# Altium PCB VRef_MEZ.PcbDoc
Units mm, origin at the board's own origin, x right, y up, seen from the top; angles counter-clockwise.
Board outline 59 x 38 mm, 2 copper layers (Top Layer, Bottom Layer); 53 components, 25 nets, 158 pads, 36 vias.
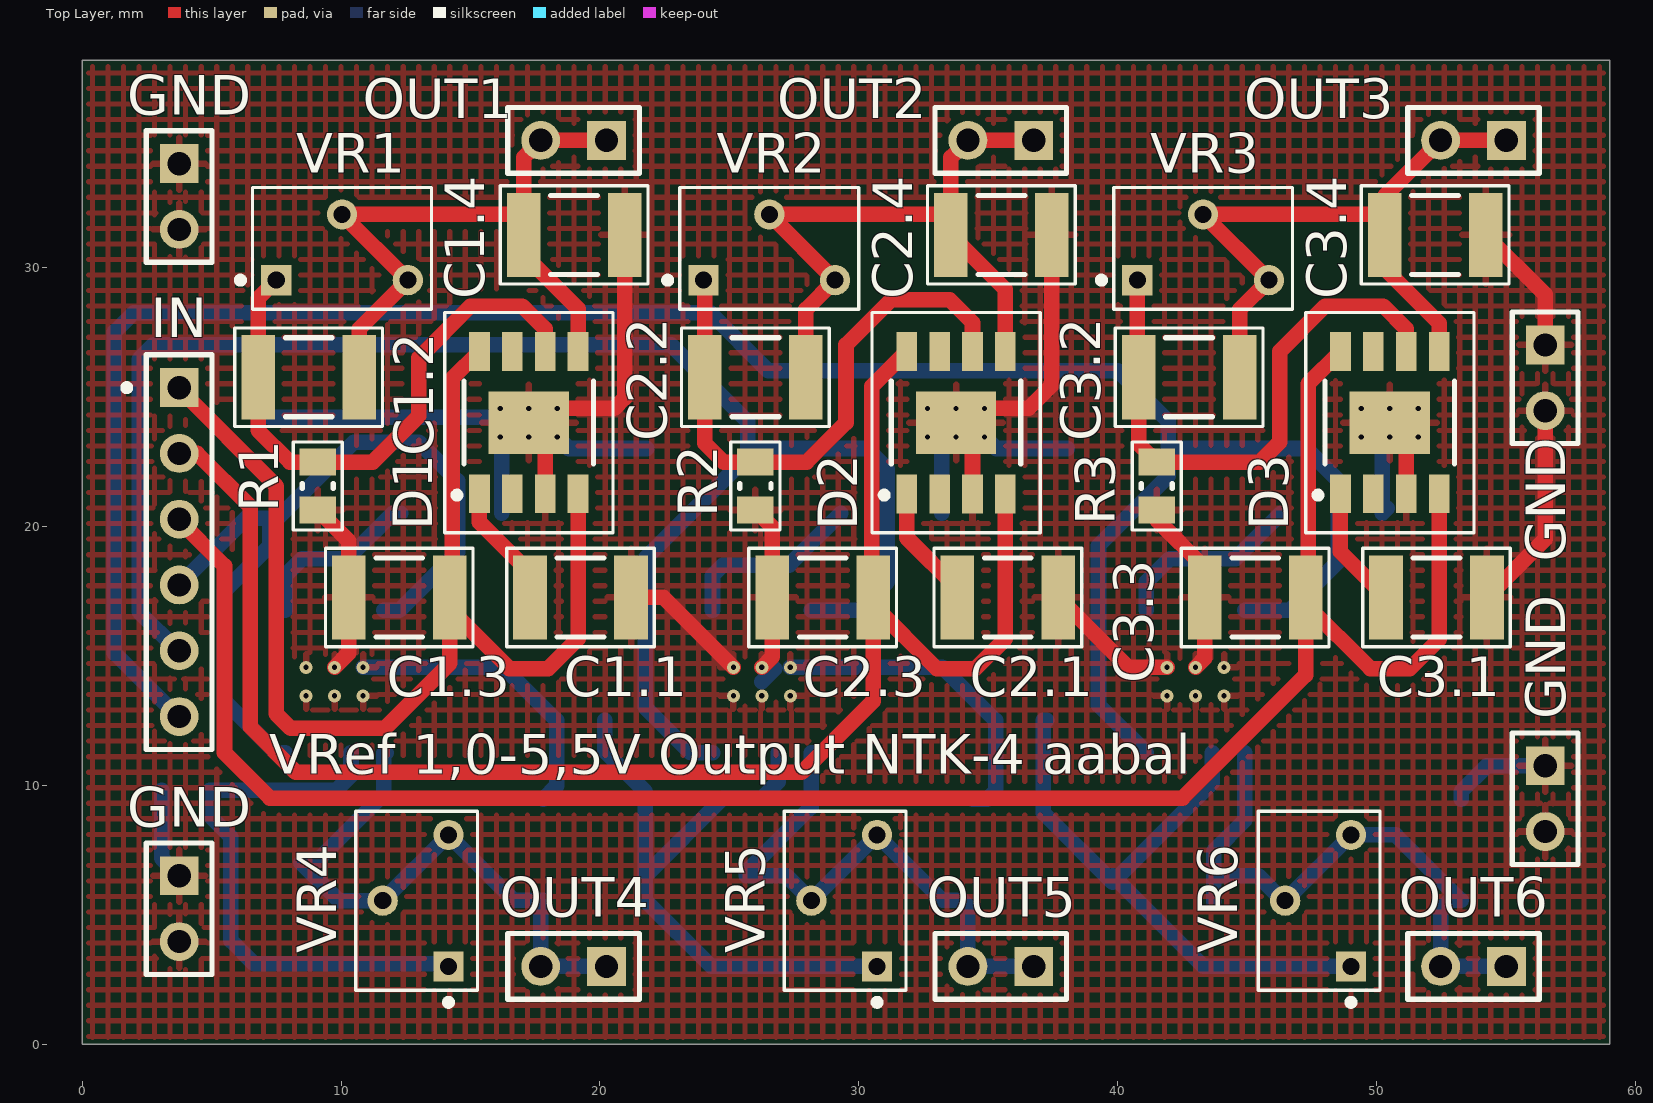
[diagram p0: Top Layer view]
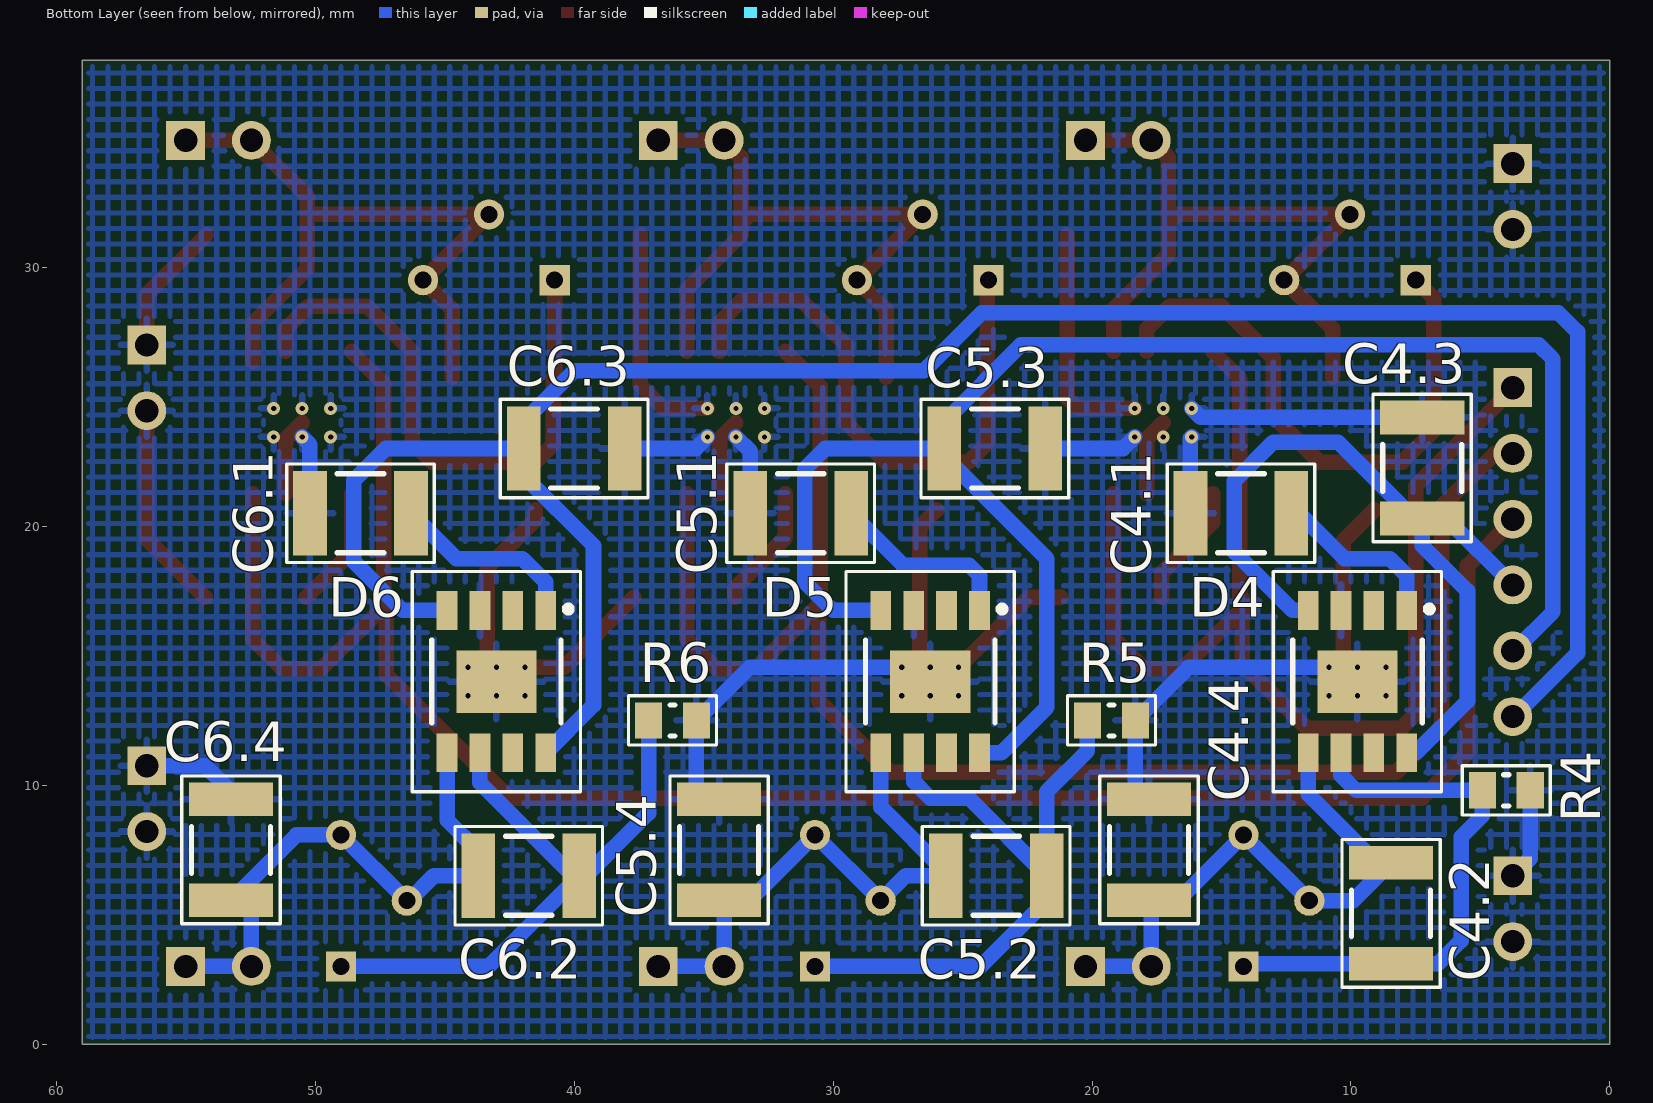
[diagram p1: Bottom Layer view, seen from below]

## Layer stack, top to bottom
Top Solder: solder mask 0.0102, Solder Resist, Dk 3.5
Top Layer: signal copper 0.0356
Dielectric 1: dielectric 0.32, FR-4, Dk 4.8
Bottom Layer: signal copper 0.0356
Bottom Solder: solder mask 0.0102, Solder Resist, Dk 3.5

## Board outline
0,0 59,0 59,38 0,38

## Design rules (kind name [scope] priority, off if disabled: settings)
Clearance [All] p1: gap=0.254 ignorepadtopadclearanceinfootprint=FALSE except(0: Arc-Hole Track-Hole SMDPad-Hole THPad-Hole Via-Hole Fill-Hole Poly-Hole Region-Hole Text-Hole)
PolygonConnect [All] p1: connectstyle=Relief reliefconductorwidth=0.254 reliefentries=4 polygonreliefangle="90 Angle" airgapwidth=0.254
RoutingVias [All] p1: holewidth=0.711 width=1.27 viastyle="Through Hole" minholewidth=0.711 minwidth=1.27 maxholewidth=0.711 maxwidth=1.27
SolderMaskExpansion [All] p1: expansion=0.102
Width [All] p1: maxlimit=0.6 minlimit=0.254 preferedwidth=0.254
30 further rules are at their usual default settings.

## Classes and differential pairs
component class VRef_MEZ: C1.1 C1.2 C1.3 C1.4 C2.1 C2.2 C2.3 C2.4 C3.1 C3.2 C3.3 C3.4 C4.1 C4.2 C4.3 C4.4 C5.1 C5.2 C5.3 C5.4 C6.1 C6.2 C6.3 C6.4 D1 D2 D3 D4 D5 D6 GND IN OUT1 OUT2 OUT3 OUT4 OUT5 OUT6 R1 R2 R3 R4 R5 R6 VR2 VR3 VR4 VR5 VR6

## Components (designator, comment, footprint, x,y, rotation, side; value= is the part's Value field where it differs from the comment)
C1.1 "0,01uF" CAP_1812 19.25,17.25 r0 top
C1.2 "C_FF" CAP_1812 8.75,25.75 r180 top
C1.3 "4,7uF" CAP_1812 12.25,17.25 r0 top
C1.4 "10uF" CAP_1812 19,31.25 r0 top
C2.1 "0,01uF" CAP_1812 35.75,17.25 r0 top
C2.2 "C_FF" CAP_1812 26,25.75 r180 top
C2.3 "4,7uF" CAP_1812 28.6,17.25 r0 top
C2.4 "10uF" CAP_1812 35.5,31.25 r0 top
C3.1 "0,01uF" CAP_1812 52.3,17.25 r0 top
C3.2 "C_FF" CAP_1812 42.75,25.75 r180 top
C3.3 "4,7uF" CAP_1812 45.3,17.25 r0 top
C3.4 "10uF" CAP_1812 52.25,31.25 r0 top
C4.1 "0,01uF" CAP_1812 14.25,20.5 r0 bottom
C4.2 "C_FF" CAP_1812 8.45,5.05 r270 bottom
C4.3 "4,7uF" CAP_1812 7.25,22.25 r270 bottom
C4.4 "10uF" CAP_1812 17.8,7.5 r90 bottom
C5.1 "0,01uF" CAP_1812 31.25,20.5 r0 bottom
C5.2 "C_FF" CAP_1812 23.7,6.5 r180 bottom
C5.3 "4,7uF" CAP_1812 23.75,23 r0 bottom
C5.4 "10uF" CAP_1812 34.4,7.5 r90 bottom
C6.1 "0,01uF" CAP_1812 48.25,20.5 r0 bottom
C6.2 "C_FF" CAP_1812 41.75,6.5 r180 bottom
C6.3 "4,7uF" CAP_1812 40,23 r0 bottom
C6.4 "10uF" CAP_1812 53.25,7.5 r90 bottom
D1 "LP3878MR-ADJ/NOPB" LP3878MR-ADJ/NOPB 17.25,24 r90 top
D2 "LP3878MR-ADJ/NOPB" LP3878MR-ADJ/NOPB 33.75,24 r90 top
D3 "LP3878MR-ADJ/NOPB" LP3878MR-ADJ/NOPB 50.5,24 r90 top
D4 "LP3878MR-ADJ/NOPB" LP3878MR-ADJ/NOPB 9.75,14 r270 bottom
D5 "LP3878MR-ADJ/NOPB" LP3878MR-ADJ/NOPB 26.25,14 r270 bottom
D6 "LP3878MR-ADJ/NOPB" LP3878MR-ADJ/NOPB 43,14 r270 bottom
GND "Header 2" HDR1X2 56.5,10.75 r270 top
GND "Header 2" HDR1X2 56.5,27 r270 top
GND "Header 2" HDR1X2 3.75,34 r270 top
GND "Header 2" HDR1X2 3.75,6.5 r270 top
IN "Header 6" HDR1X6 3.75,25.35 r270 top
OUT1 "Header 2" HDR1X2 20.25,34.9 r180 top
OUT2 "Header 2" HDR1X2 36.75,34.9 r180 top
OUT3 "Header 2" HDR1X2 55,34.9 r180 top
OUT4 "Header 2" HDR1X2 20.25,3 r180 top
OUT5 "Header 2" HDR1X2 36.75,3 r180 top
OUT6 "Header 2" HDR1X2 55,3 r180 top
R1 "RES" RES_0805 9.1,21.55 r90 top
R2 "RES" RES_0805 26,21.55 r90 top
R3 "RES" RES_0805 41.5,21.55 r90 top
R4 "RES" RES_0805 4,9.8 r0 bottom
R5 "RES" RES_0805 19.25,12.5 r0 bottom
R6 "RES" RES_0805 36.2,12.5 r0 bottom
VR1 "RES 3266W" "RES 3266W" 7.5,29.5 r0 top
VR2 "RES 3266W" "RES 3266W" 24,29.5 r0 top
VR3 "RES 3266W" "RES 3266W" 40.75,29.5 r0 top
VR4 "RES 3266W" "RES 3266W" 14.15,3 r90 top (schematic designator VR4.1)
VR5 "RES 3266W" "RES 3266W" 30.7,3 r90 top
VR6 "RES 3266W" "RES 3266W" 49,3 r90 top

## Footprints (in the part's own frame and the unit in brackets; to place one, negate y for a bottom-side part, rotate by r counter-clockwise, add the part's x,y. Pads: shape width x height; smd on the part's side, far side on the other; paste and mask are expansions set on the pad)
CAP_1812 [mm]
  rect 1.3x3.25 smd: 1(-1.95,0) 2(1.95,0)
  silkscreen extent -2.85,-1.9 2.85,1.9, body extent -2.25,-1.6 2.25,1.6, height 2
HDR1X2 [mm] "Connector; Header; 2 Position"
  rect 1.5x1.5 hole 0.9: 1(0,0)
  round 1.5 hole 0.9: 2(2.54,0)
  silkscreen extent -1.27,-1.27 3.81,1.27
HDR1X6 [mm] "Connector; Header; 6 Position"
  rect 1.5x1.5 hole 0.9: 1(0,0)
  round 1.5 hole 0.9: 2(2.54,0) 3(5.08,0) 4(7.62,0) 5(10.16,0) 6(12.7,0)
  silkscreen extent -1.27,-1.27 13.97,1.27
LP3878MR-ADJ/NOPB [mm] "SOIC, 8-Leads, Body 4,90x3,90mm, Pitch 1,27mm, Thermal Pad 3,10x2,41mm, IPC Medium Density"
  rect 1.5x0.8 smd: 1(-2.75,1.905) 2(-2.75,0.635) 3(-2.75,-0.635) 4(-2.75,-1.905) 5(2.75,-1.905) 6(2.75,-0.635) 7(2.75,0.635) 8(2.75,1.905)
  rect 2.41x3.1 smd: 9(0,0)
  silkscreen extent -4.25,-3.25 4.25,3.25, body extent -2,-2.5 2,2.5, height 1.68
"RES 3266W" [mm]
  rect 1.168x1.168 hole 0.66: 1(0,0)
  round 1.168 hole 0.66: 2(2.54,2.54) 3(5.08,0)
  silkscreen extent -1.48,-1.12 5.99,3.58, body extent -0.81,-1.02 5.9,3.48, height 8.77
RES_0805 [mm]
  rect 1.05x1.4 smd: 1(-0.925,0) 2(0.925,0)
  silkscreen extent -1.7,-0.95 1.7,0.95, body extent -1.1,-0.7 1.1,0.7, height 1

## Part data
C1.1 C1.2 C1.3 C1.4 C2.1 C2.2 C2.3 C2.4 C3.1 C3.2 C3.3 C3.4 C4.1 C4.2 C4.3 C4.4 C5.1 C5.2 C5.3 C5.4 C6.1 C6.2 C6.3 C6.4: library part CAP
GND GND GND GND OUT1 OUT2 OUT3 OUT4 OUT5 OUT6: "Header, 2-Pin", LatestRevisionDate=17-Jul-2002, LatestRevisionNote="Re-released for DXP Platform.", Publisher="Altium Limited"
IN: "Header, 6-Pin", LatestRevisionDate=17-Jul-2002, LatestRevisionNote="Re-released for DXP Platform.", Publisher="Altium Limited"

## Via types
v1: diameter 0.5, hole 0.2, Top Layer to Bottom Layer, 36 vias

## Nets (pads, with @x,y where several pads share a name; then routed paths per layer and width w, separated by ;. In a path a pad name is that pad's centre, name@x,y a point inside that pad or via, vN(x,y) a via of type N, cw(c..) or ccw(c..) an arc to the next point about the centre after c; other vN are vias at no path point)
GND: C1.1.2 C1.3.1 C1.4.2 C2.1.2 C2.3.1 C2.4.2 C3.1.2 C3.3.1 C3.4.2 C4.1.2 C4.3.1 C4.4.2 C5.1.2 C5.3.1 C5.4.2 C6.1.2 C6.3.1 C6.4.2 D1.3 D1.9 D2.3 D2.9 D3.3 D3.9 D4.3 D4.9 D5.3 D5.9 D6.3 D6.9 GND.1 GND.2 R1.1 R2.1 R3.1 R4.1 R5.1 R6.1 | length 128.8
  Top Layer w0.6: R1.1 10.3,19.425 C1.3.1 10.3,15.1 v1(9.75,14.55) ; D1.9 17.885,23.365 D1.3 ; v1(18.35,24.55) 20.55,24.55 20.95,24.95 C1.4.2 ; C1.1.2 22.45,17.25 v1(25.15,14.55) ; R2.1 26.65,19.975 C2.3.1 26.65,14.95 v1(26.25,14.55) ; D2.9 34.385,23.365 D2.3 ; v1(34.85,24.55) 36.55,24.55 37.45,25.45 C2.4.2 ; C2.1.2 40.4,14.55 v1(41.9,14.55) ; R3.1 41.5,20.25 43.35,18.4 C3.3.1 43.35,14.9 v1(43,14.55) ; D3.9 51.135,23.365 D3.3 ; C3.4.2 56.5,28.95 GND.1@56.5,27 ; C3.1.2 56.5,19.5 GND.2@56.5,24.46
  Bottom Layer w0.6: R4.1 3.075,7.175 GND.1@3.75,6.5 ; C4.3.1 15.8,24.2 v1(16.15,24.55) ; v1(10.85,14.55) 16.275,14.55 R5.1 18.325,9.975 C4.4.2 ; v1(16.15,23.45) 16.2,23.4 C4.1.2 ; v1(18.35,23.45) 18.8,23 C5.3.1 ; D5.9 D5.9@26.75,14.5 ; v1(27.35,14.55) 33.225,14.55 R6.1 35.275,9.775 34.95,9.45 C5.4.2 ; C5.1.2 33.2,22.9 v1(33.75,23.45) ; v1(34.85,23.45) 35.3,23 C6.3.1 ; C6.1.2@50.4,20.7 C6.1.2 50.2,23.15 v1(50.5,23.45) ; C6.4.2 53.25,9.75 54.25,10.75 GND.1@56.5,10.75
  other v1: 8.65,13.45 9.75,13.45 10.85,13.45 25.15,13.45 26.25,13.45 27.35,13.45 41.9,13.45 43,13.45 44.1,13.45 8.65,14.55 44.1,14.55 17.25,23.45 32.65,23.45 49.4,23.45 51.6,23.45 17.25,24.55 32.65,24.55 33.75,24.55 49.4,24.55 50.5,24.55 51.6,24.55
IN1: C1.3.2 D1.4 D1.8 IN.1 | length 46.6
  Top Layer w0.6: IN.1@3.7,25.35 7.5,21.55 7.5,12.75 8.052,12.198 11.698,12.198 14.2,14.7 C1.3.2@14.2,16.8 ; D1.8 14.292,25.697 14.292,17.305 14.2,17.214 C1.3.2@14.2,16.8 ; D1.4 19.155,15.655 18,14.5 16.5,14.5 C1.3.2@14.2,16.8
IN2: C2.3.2 D2.4 D2.8 IN.2 | length 64.1
  Top Layer w0.6: IN.2 4.44,22.81 6.5,20.75 6.5,12.25 8.25,10.5 27.8,10.5 30.55,13.25 C2.3.2@30.55,16.75 ; D2.8 30.5,25.405 30.5,17.3 C2.3.2 30.55,16.95 33,14.5 34.5,14.5 35.655,15.655 D2.4
IN3: C3.3.2 D3.4 D3.8 IN.3 | length 79.5
  Top Layer w0.6: IN.3@3.7,20.27 5.5,18.47 5.5,11.25 7.25,9.5 42.5,9.5 47.25,14.25 C3.3.2@47.25,17 ; D3.8 47.345,25.5 47.345,17.345 C3.3.2 C3.3.2@47.25,17 ; D3.4 52.405,15.63 51.275,14.5 49.75,14.5 C3.3.2@47.25,17
IN4: C4.3.2 D4.4 D4.8 IN.4 | length 31.1
  Bottom Layer w0.6: IN.4 6.32,20.3 C4.3.2 ; D4.8 7.5,11.25 5.5,13.25 5.5,17.5 7.25,19.25 C4.3.2 ; D4.4 12.25,16.75 14.5,19 14.5,21.75 13,23.25 10.5,23.25 7.55,20.3 C4.3.2
IN5: C5.3.2 D5.4 D5.8 IN.5 | length 66.4
  Bottom Layer w0.6: IN.5 3.7,15.19 2.2,16.69 2.2,26.45 2.75,27 22.75,27 25.7,24.05 C5.3.2 ; D5.8 23.5,11.25 21.75,13 21.75,18.75 25.7,22.7 C5.3.2 ; D5.4 30,16.75 31.1,17.85 31.1,22.2 30.3,23 C5.3.2
IN6: C6.3.2 D6.4 D6.8 IN.6 | length 87.9
  Bottom Layer w0.6: IN.6@3.7,12.65 1.25,15.1 1.25,27.5 2,28.25 24.25,28.25 26.5,26 40,26 41.95,24.05 C6.3.2 ; D6.8 39.25,13.095 39.25,19.25 41.95,21.95 C6.3.2 ; D6.4 46.625,16.75 48.5,18.625 48.5,21.775 47.275,23 C6.3.2
NetC1.1_1: C1.1.1 D1.1 | length 4.8
  Top Layer w0.6: D1.1 15.345,20.155 17.3,18.2 C1.1.1
NetC1.2_2: C1.2.2 D1.6 R1.2 VR1.1 | length 22.7
  Top Layer w0.6: VR1.1 6.8,28.8 C1.2.2 6.8,23.7 8.025,22.475 R1.2 11.225,22.475 13,24.25 13,26.5 15,28.5 17,28.5 17.885,27.615 D1.6
NetC2.1_1: C2.1.1 D2.1 | length 4.8
  Top Layer w0.6: D2.1 31.845,19.555 33.8,17.6 C2.1.1
NetC2.2_2: C2.2.2 D2.6 R2.2 VR2.1 | length 22.9
  Top Layer w0.6: VR2.1 24.05,29.45 C2.2.2 24.05,23.2 24.775,22.475 R2.2@25.95,22.475 ; R2.2@26,22.425 R2.2@25.95,22.475 ; D2.6 34.385,27.865 33.5,28.75 31.25,28.75 29.5,27 29.5,24 27.975,22.475 R2.2 R2.2@25.95,22.475
NetC3.1_1: C3.1.1 D3.1 | length 4.7
  Top Layer w0.6: D3.1 48.595,19.005 C3.1.1
NetC3.2_2: C3.2.2 D3.6 R3.2 VR3.1 | length 22.7
  Top Layer w0.6: VR3.1 40.75,25.8 C3.2.2 40.8,23.175 R3.2 45.475,22.475 46.25,23.25 46.25,26.75 48,28.5 50.25,28.5 51.135,27.615 D3.6
NetC4.1_1: C4.1.1 D4.1 | length 6.8
  Bottom Layer w0.6: D4.1 7.845,18.095 8.5,18.75 10.25,18.75 12,20.5 C4.1.1
NetC4.2_2: C4.2.2 D4.6 R4.2 VR4.1 | length 21.5
  Bottom Layer w0.6: D4.6 10.385,10.385 9.8,9.8 R4.2 4.925,8.825 5.75,8 5.75,4 6.65,3.1 C4.2.2 14.05,3.1 VR4.1
NetC5.1_1: C5.1.1 D5.1 | length 7.3
  Bottom Layer w0.6: D5.1 24.345,18.095 24.75,18.5 27.3,18.5 C5.1.1
NetC5.2_2: C5.2.2 D5.6 R5.2 VR5.1 | length 25.4
  Bottom Layer w0.6: R5.2 20.175,11.325 21.75,9.75 C5.2.2 ; D5.6 26.885,10.135 26.25,9.5 24.75,9.5 C5.2.2 ; VR5.1 24.3,3 21.75,5.55 C5.2.2
NetC6.1_1: C6.1.1 D6.1 | length 7.4
  Bottom Layer w0.6: D6.1 41.095,17.845 42,18.75 44.55,18.75 C6.1.1
NetC6.2_2: C6.2.2 D6.6 R6.2 VR6.1 | length 24.7
  Bottom Layer w0.6: R6.2@37.25,12.5 R6.2 37.125,8.925 39.8,6.25 C6.2.2@39.925,6.375 ; C6.2.2 C6.2.2@39.925,6.375 ; D6.6 43.635,10.085 C6.2.2@39.925,6.375 ; VR6.1 43.3,3 C6.2.2@39.925,6.375
OUT1: C1.2.1 C1.4.1 D1.5 OUT1.1 OUT1.2 VR1.2 VR1.3 | length 26.9
  Top Layer w0.6: C1.2.1 10.7,27.62 VR1.3 VR1.2 16.71,32.04 C1.4.1@17.05,31.7 ; D1.5 19.155,28.395 17.05,30.5 C1.4.1 C1.4.1@17.05,31.7 ; OUT1.1@20,34.9 OUT1.2 17.05,34.24 C1.4.1@17.05,31.7
OUT2: C2.2.1 C2.4.1 D2.5 OUT2.1 OUT2.2 VR2.2 VR2.3 | length 26.8
  Top Layer w0.6: C2.2.1 27.95,28.37 VR2.3 VR2.2 33.21,32.04 C2.4.1@33.55,31.7 ; D2.5 35.655,29.145 C2.4.1 C2.4.1@33.55,31.7 ; OUT2.1 OUT2.2 33.55,34.24 C2.4.1@33.55,31.7
OUT3: C3.2.1 C3.4.1 D3.5 OUT3.1 OUT3.2 VR3.2 VR3.3 | length 27.7
  Top Layer w0.6: C3.2.1 44.7,28.37 VR3.3 VR3.2 50.21,32.04 C3.4.1@50.3,31.95 ; D3.5@52.405,26.345 D3.5 52.405,27.845 50.3,29.95 C3.4.1 C3.4.1@50.3,31.95 ; OUT3.1 OUT3.2 50.3,32.74 C3.4.1@50.3,31.95
OUT4: C4.2.1 C4.4.1 D4.5 OUT4.1 OUT4.2 VR4.2 VR4.3 | length 23.2
  Bottom Layer w0.6: D4.5@11.75,11.25 D4.5 11.655,9.655 9,7 C4.2.1 9.91,5.54 VR4.2 VR4.3 16.68,5.55 C4.4.1 17.71,5.46 OUT4.2 OUT4.1
OUT5: C5.2.1 C5.4.1 D5.5 OUT5.1 OUT5.2 VR5.2 VR5.3 | length 21.9
  Bottom Layer w0.6: D5.5@28.25,11.25 D5.5 28.155,9.155 25.65,6.65 C5.2.1 27.2,6.5 VR5.2 VR5.3 33.23,5.55 34,5.55 34.21,5.34 OUT5.2 OUT5.1
OUT6: C6.2.1 C6.4.1 D6.5 OUT6.1 OUT6.2 VR6.2 VR6.3 | length 24
  Bottom Layer w0.6: C6.2.1@43.7,5.5 C6.2.1@43.7,6.45 ; D6.5 44.905,8.655 43.7,7.45 C6.2.1 45.42,6.5 46.42,5.5 VR6.2 VR6.3 50.72,8.08 C6.4.1 52.8,5.55 52.46,5.21 OUT6.2 OUT6.1
pads on no net: D1.2 D1.7 D2.2 D2.7 D3.2 D3.7 D4.2 D4.7 D5.2 D5.7 D6.2 D6.7

## Polygon pours and split planes (outlines as drawn)
GND on Bottom Layer "GND_L02_P060" (hatched 90Degree grid 0.6 track 0.2, remove dead copper, pour order 60): 0.25,37.75 58.75,37.75 58.75,0.25 0.25,0.25
GND on Bottom Layer "GND_L02_P066" (hatched 90Degree grid 0.6 track 0.2, remove dead copper, pour order 66): 0.25,37.75
GND on Bottom Layer "GND_L02_P064" (hatched 90Degree grid 0.6 track 0.2, remove dead copper, pour order 64): -1,36
GND on Bottom Layer "GND_L02_P062" (hatched 90Degree grid 0.6 track 0.2, remove dead copper, pour order 62): 0.25,37.75
GND on Bottom Layer "GND_L02_P026" (hatched 90Degree grid 0.6 track 0.2, remove dead copper, pour order 26): 0.25,35.75
GND on Bottom Layer "GND_L02_P006" (hatched 90Degree grid 0.6 track 0.2, remove dead copper, pour order 6): 0.25,2.25
GND on Bottom Layer "GND_L02_P002" (hatched 90Degree grid 0.6 track 0.2, remove dead copper, pour order 2): 1,35
GND on Top Layer "GND_L01_P058" (hatched 90Degree grid 0.6 track 0.2, remove dead copper, pour order 58): 0.25,37.75 58.75,37.75 58.75,0.25 0.25,0.25
GND on Top Layer "GND_L01_P046" (hatched 90Degree grid 0.6 track 0.2, remove dead copper, pour order 46): 0.5,37.75
GND on Top Layer "GND_L01_P032" (hatched 90Degree grid 0.6 track 0.2, remove dead copper, pour order 32): 59.75,35.75

## Silkscreen, mask and mechanical layers (free items; w line width, h text height)
Top Overlay:
  circle w0.3: c1.725,25.35 r0.1
  text "VRef 1,0-5,5V Output NTK-4 aabal" at 7.225,10.45 h1.52
Mechanical 1:
  the board outline again, w0.254